# Altium PCB mach-in.PcbDoc
Units mil, origin at the board's own origin, x right, y up, seen from the top; angles counter-clockwise.
Board outline 5675.03 x 3515.03 mil, 2 copper layers (Top Layer, Bottom Layer); 7 components, 19 nets, 90 pads, 0 vias.
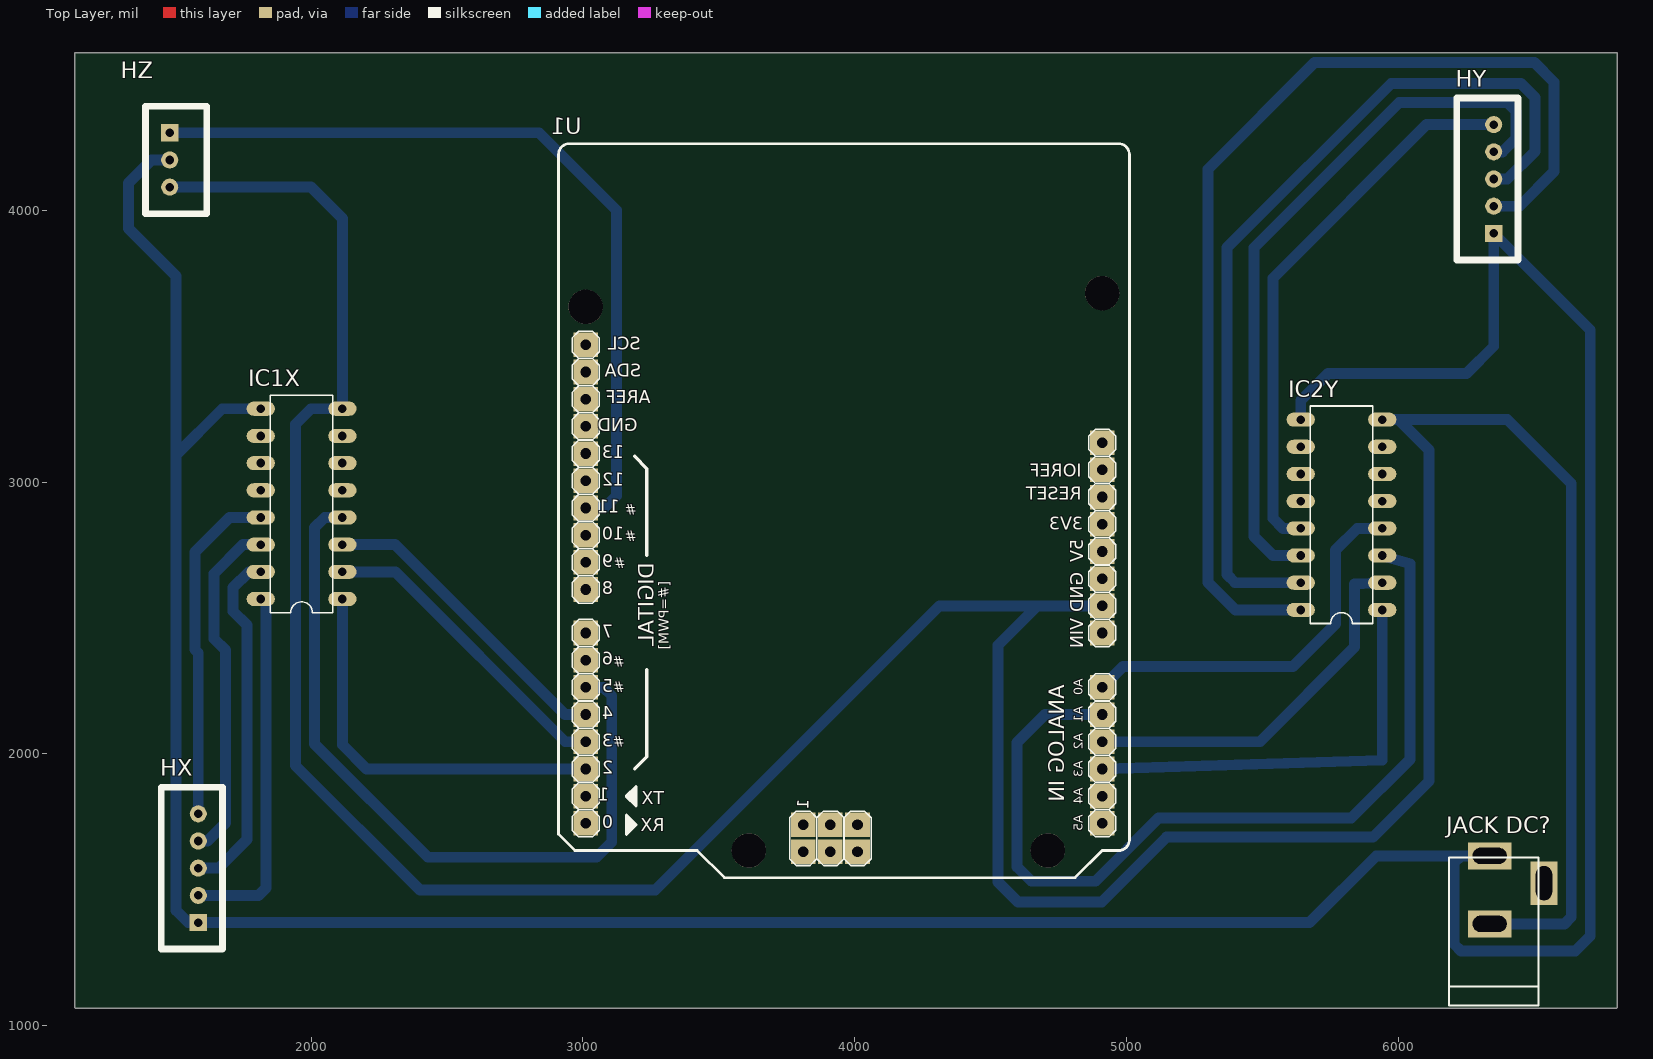
[diagram p0: Top Layer view]
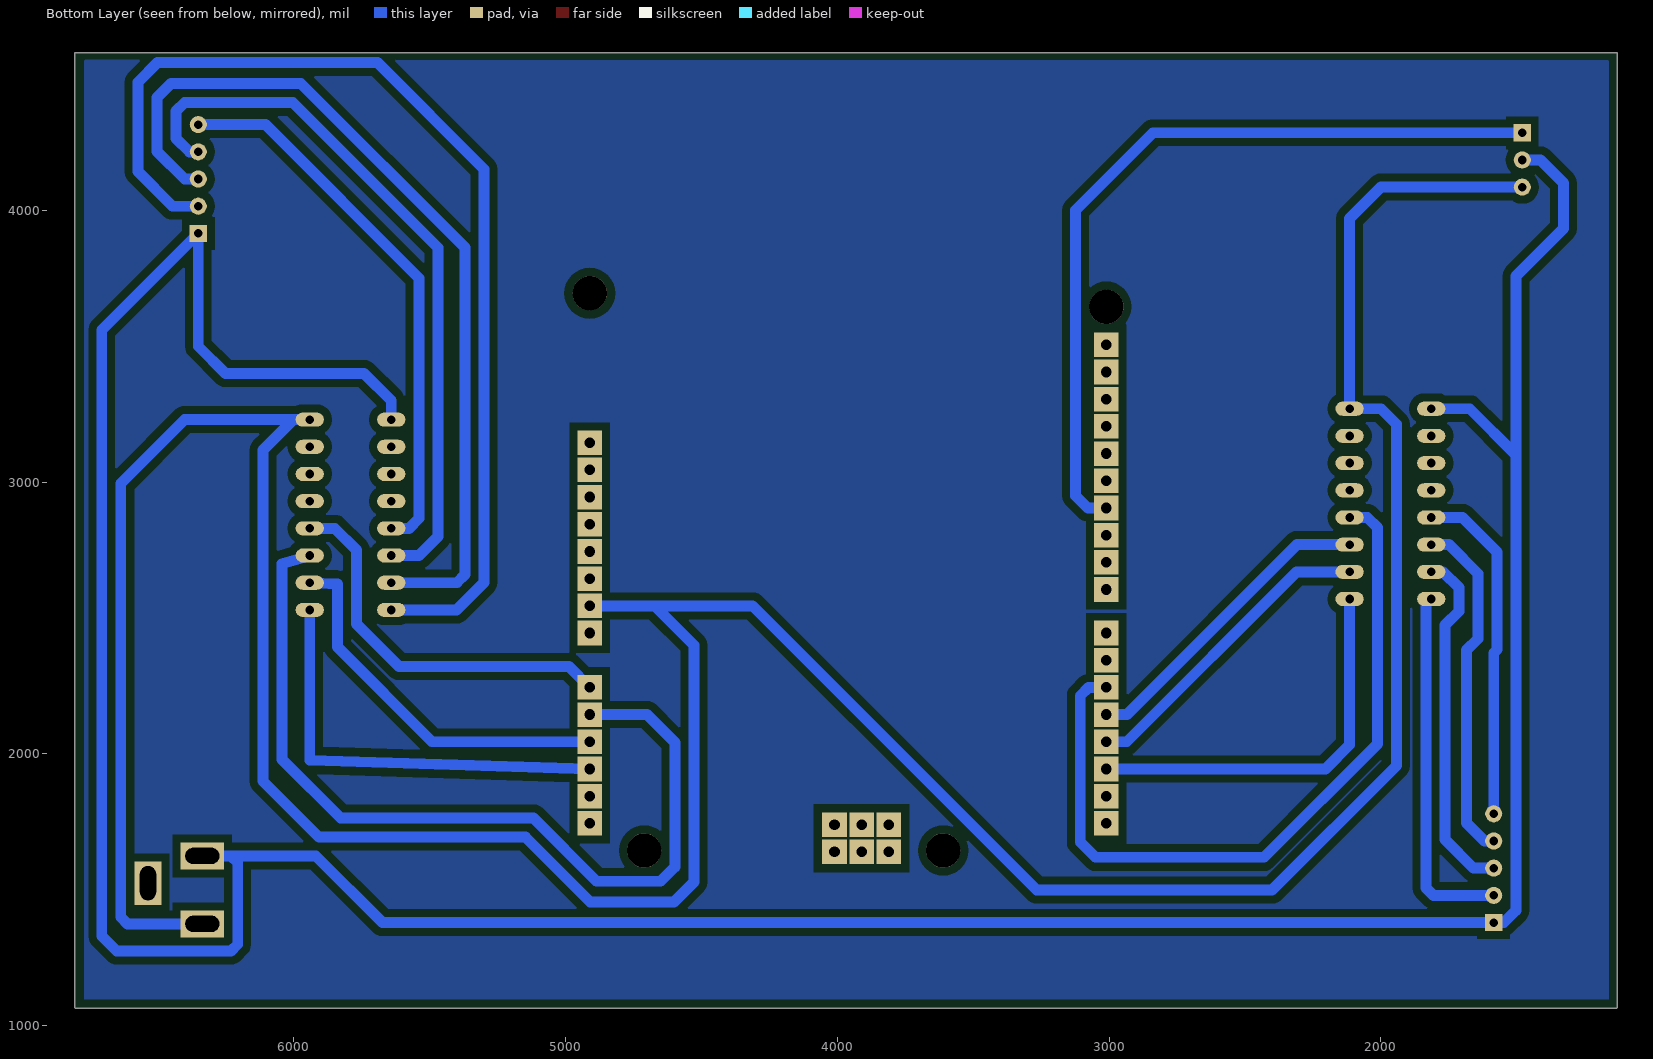
[diagram p1: Bottom Layer view, seen from below]
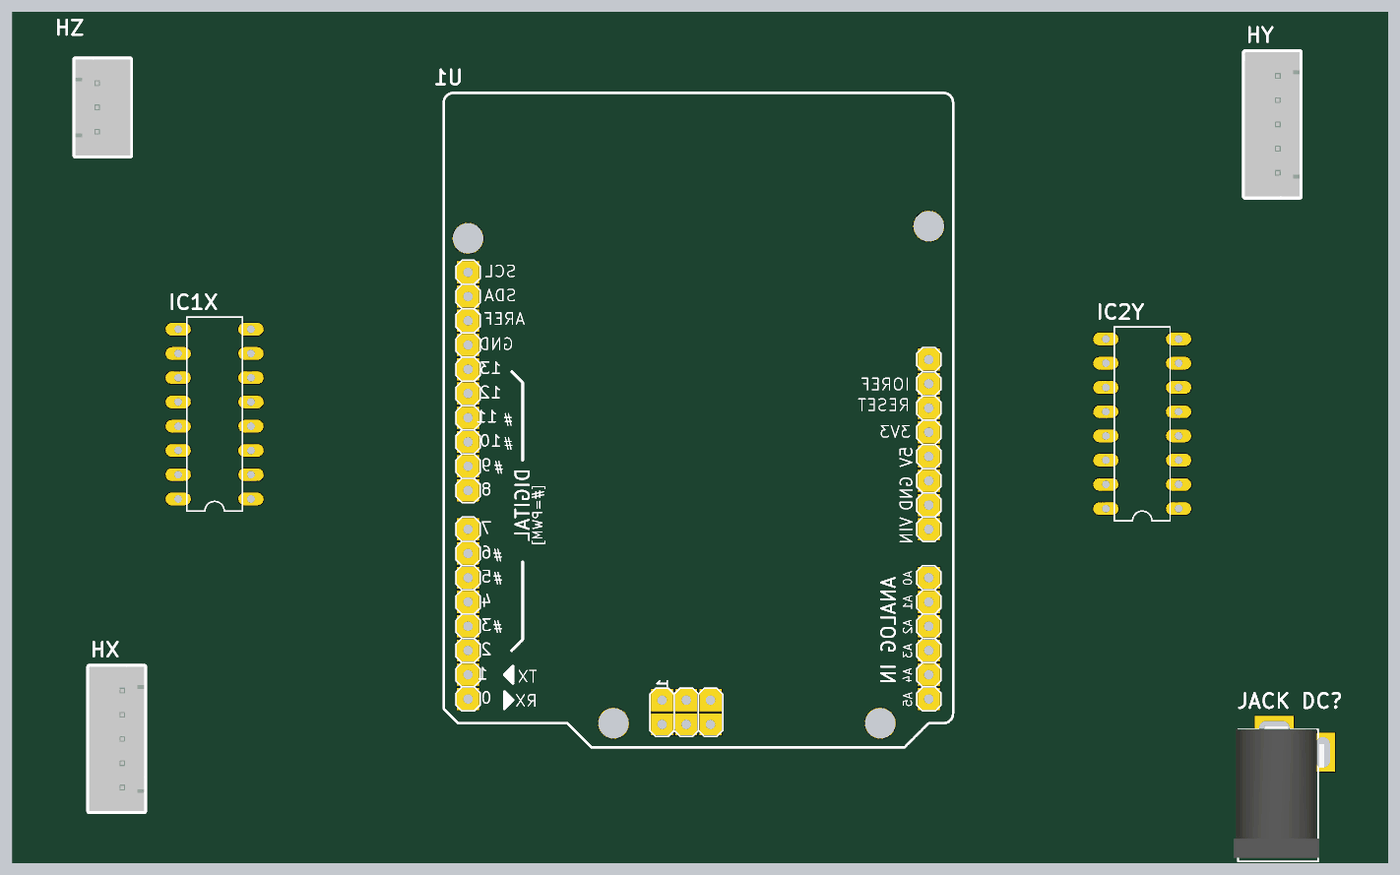
[diagram p2: 3D render of the assembled board from above, using the file's embedded part models]

## Layer stack, top to bottom
Top Solder: solder mask 0.4, Solder Resist, Dk 3.5
Top Layer: signal copper 1.4
Dielectric 1: dielectric 12.6, FR-4, Dk 4.8
Bottom Layer: signal copper 1.4
Bottom Solder: solder mask 0.4, Solder Resist, Dk 3.5

## Board outline
1129.98,1070 1129.98,4575 cw(c1135,4575) 1135,4580.02 6800,4580.02 cw(c6800,4575) 6805.02,4575 6805.02,1070 cw(c6800,1070) 6800,1064.98 1135,1064.98 cw(c1135,1070)

## Design rules (kind name [scope] priority, off if disabled: settings)
Clearance [All] p1: gap=30 ignorepadtopadclearanceinfootprint=FALSE
PolygonConnect [All] p1: connectstyle=Relief reliefconductorwidth=10 reliefentries=4 polygonreliefangle="90 Angle" airgapwidth=10
RoomDefinition mach-nguyen-ly [InComponentClass('mach-nguyen-ly')] p1: confinementstyle=ConfineIn formatcopy=TRUE lockcomponents=FALSE outline 7080,941.97 14415.27,941.97 14415.27,3735 7080,3735
RoutingLayers [All] p1: top layer_v5=FALSE bottom layer_v5=TRUE
RoutingVias [All] p1: holewidth=28 width=50 viastyle="Through Hole" minholewidth=28 minwidth=50 maxholewidth=28 maxwidth=50
SolderMaskExpansion [All] p1: expansion=4
Width [All] p1: maxlimit=70 minlimit=30 preferedwidth=40
29 further rules are at their usual default settings.

## Components (designator, comment, footprint, x,y, rotation, side; value= is the part's Value field where it differs from the comment)
HX "Header 5P 2.54" XH2.54M-5 1585,1380 r90 top
HY "Header 5P 2.54" XH2.54M-5 6350,3915 r90 top
HZ "Header 3P VH3.96" XH2.54M-3 1480,4285 r270 top
IC1X "ULN2003A" DIL16 1965,2920 r90 top
IC2Y "ULN2003A" DIL16 5790,2880 r90 top
"JACK DC?" "JACK DC 5.5" "JACK DC 5.5" 6435,1500 r90 top value="Jac DC"
U1 "Arduino Uno" "Arduino Uno" 3965.12,2825.31 r270 top

## Footprints (in the part's own frame and the unit in brackets; to place one, negate y for a bottom-side part, rotate by r counter-clockwise, add the part's x,y. Pads: shape width x height; smd on the part's side, far side on the other; paste and mask are expansions set on the pad)
"Arduino Uno" [mm]
  rect 2.3x2.3 hole 1: 0(27.44,-24.26) 1(24.9,-24.26) 2(22.36,-24.26) 3(19.82,-24.26) 3V3(-0.5,24) 4(17.28,-24.26) 5(14.74,-24.26) 5V(2.04,24) 6(12.2,-24.26) 7(9.66,-24.26) 8(5.596,-24.26) 9(3.056,-24.26) 10(0.516,-24.26) 11(-2.024,-24.26) 12(-4.564,-24.26) 13(-7.104,-24.26) A0(14.74,24) A1(17.28,24) A2(19.82,24) A3(22.36,24) A4(24.9,24) A5(27.44,24) AREF(-12.184,-24.26) GND1(4.58,24) GND2(7.12,24) GND3(-9.644,-24.26) ICSP1(27.567,-3.94) ICSP2(30.107,-3.94) ICSP3(27.567,-1.4) ICSP4(30.107,-1.4) ICSP5(27.567,1.14) ICSP6(30.107,1.14) IOREF(-5.58,24) NC(-8.12,24) RESET(-3.04,24) SCL(-17.264,-24.26) SDA(-14.724,-24.26) Vin(9.66,24)
  round 3.2 hole 3.2: H1(-20.82,-24.26) H2(-22.09,24) H3(29.98,18.92) H4(29.98,-9.02)
  Bottom Layer lines w0.305: -14.47,-24.26 -14.724,-24.26
  silkscreen extent -36.06,-26.8 32.52,26.54
DIL16 [mil]
  oval 52x104 hole 32: 1(-350,-150) 2(-250,-150) 3(-150,-150) 4(-50,-150) 5(50,-150) 6(150,-150) 7(250,-150) 8(350,-150) 9(350,150) 10(250,150) 11(150,150) 12(50,150) 13(-50,150) 14(-150,150) 15(-250,150) 16(-350,150)
  silkscreen extent -400,-115 400,115
"JACK DC 5.5" [mil] "Jac DC input"
  rect 100x160 hole 59.06 slot 125.98 at 90 deg: 1(125,100) 2(-125,100)
  rect 160x100 hole 59.06 slot 125.98 at 0 deg: 3(25,-100)
  silkscreen extent -425,-80 120,250, body extent -410,-105 134,269, height 434
XH2.54M-3 [mm]
  rect 1.6x1.6 hole 0.8: 1(0,0)
  round 1.6 hole 0.8: 2(2.54,0) 3(5.08,0)
  silkscreen extent -2.48,-2.26 7.56,3.46, body extent -2.48,-2.26 7.56,3.48, height 6.91
XH2.54M-5 [mm]
  rect 1.6x1.6 hole 0.8: 1(0,0)
  round 1.6 hole 0.8: 2(2.54,0) 3(5.08,0) 4(7.62,0) 5(10.16,0)
  silkscreen extent -2.48,-2.26 12.64,3.46, body extent -2.48,-2.26 12.64,3.48, height 6.91

## Part data
HX HY: library part "Header 5P 2.54 Duc Thang", "C?m", Chung_Loai=C?m, Don_Vi=Con, Ma_Hang=MH001298, Ten_Linh_Kien="Header 5P XH2.54-5P Ð?c Th?ng"
HZ: library part "Header 3P 2.54 Duc Thang", "C?m", Chung_Loai=C?m, Don_Vi=Con, Ma_Hang=MH001292, Ten_Linh_Kien="Header 3P XH2.54-3P Ð?c Th?ng"
IC1X IC2Y: "Bipolar _BJT_ Transistor Array 7 NPN Darlington 50V 500mA Through Hole 16-DIP", Package="DIP-16 STMicroelectronics", Availability=Unavailable, MF=STMicroelectronics, MP=ULN2003A, Price=None, SnapEDA_Link=https://www.snapeda.com/parts/ULN2003A/STMicroelectronics/view-part/4503171/?ref=snap

## Nets (pads, with @x,y where several pads share a name; then routed paths per layer and width w, separated by ;. In a path a pad name is that pad's centre, name@x,y a point inside that pad or via, vN(x,y) a via of type N, cw(c..) or ccw(c..) an arc to the next point about the centre after c; other vN are vias at no path point)
5V: "JACK DC?.1" HX.1 HY.1 HZ.2 IC1X.9 IC2Y.9 | length 13147.6
  Bottom Layer w40: HZ.2 1413,4185 1328,4100 1328,3933 1503,3758 1503,3100 ; IC1X.9 1673,3270 1503,3100 ; IC2Y.9 5640,3300 5740,3400 6250,3400 6350,3500 HY.1 6705,3560 6705,1330 6650,1275 6230,1275 6205,1300 6205,1600 6230,1625 ; 6335,1625 6230,1625 ; 1503,3100 1503,1425 1548,1380 HX.1 5673,1380 5918,1625 6230,1625
GND: "JACK DC?.2" HZ.3 IC1X.8 IC2Y.8 U1.GND2 | length 13372.7
  Bottom Layer w40: HZ.3 2000,4085 2115,3970 IC1X.8 2000,3270 1943,3213 1943,1957 2400,1500 3266,1500 4311,2545 4672,2545 ; U1.GND2 4672,2545 ; IC2Y.8 6000,3230 ; 6335,1375 6610,1375 6635,1400 6635,2995 6400,3230 6000,3230 ; 4672,2545 4527,2400 4527,1529 4600,1456 4908,1456 5146,1694 5906,1694 6112,1900 6112,3118 6000,3230
NetHX_2: HX.2 IC1X.16 | length 1342.1
  Bottom Layer w40: HX.2 1806.89,1480 1834,1507.11 1834,2570 IC1X.16
NetHX_3: HX.3 IC1X.15 | length 1296.6
  Bottom Layer w40: HX.3 1658.89,1580 1764,1685.11 1764,2474 1713,2525 1713,2612 1771,2670 IC1X.15
NetHX_4: HX.4 IC1X.14 | length 1277.9
  Bottom Layer w40: HX.4 1618.82,1680 1684.89,1746.06 1684.89,2382.11 1643,2424 1643,2663 1750,2770 IC1X.14
NetHX_5: HX.5 IC1X.13 | length 1262.6
  Bottom Layer w40: HX.5 1585,2372 1573,2384 1573,2743 1700,2870 IC1X.13
NetHY_2: HY.2 IC2Y.16 | length 3971.6
  Bottom Layer w40: IC2Y.16 5400,2530 5299,2631 5299,4151 5691,4543 6500,4543 6572,4471 6572,4142 6445,4015 HY.2
NetHY_3: HY.3 IC2Y.15 | length 3282
  Bottom Layer w40: IC2Y.15 5399,2630 5369,2660 5369,3862.53 5972.97,4466.5 6450,4466.5 6501.5,4415 6501.5,4216.5 6400,4115 HY.3
NetHY_4: HY.4 IC2Y.14 | length 2663.4
  Bottom Layer w40: IC2Y.14 5538,2730 5468,2800 5468,3862 6002.5,4396.5 6400,4396.5 6431.5,4365 6431.5,4264.5 6382,4215 HY.4
NetHY_5: HY.5 IC2Y.13 | length 2046.4
  Bottom Layer w40: IC2Y.13 5575,2830 5538,2867 5538,3750 6103,4315 HY.5
X1: IC1X.1 U1.2 | length 1467.9
  Bottom Layer w40: IC1X.1 2115,2034 2204,1945 U1.2
X2: IC1X.2 U1.3 | length 1153.9
  Bottom Layer w40: IC1X.2 2310,2670 2935,2045 U1.3
X3: IC1X.3 U1.4 | length 1153.9
  Bottom Layer w40: IC1X.3 2309,2770 2934,2145 U1.4
X4: IC1X.4 U1.5 | length 2849.1
  Bottom Layer w40: IC1X.4 2050,2870 2013,2833 2013,2037 2430,1620 3050,1620 3106,1676 3106,2214 3075,2245 U1.5
Y1: IC2Y.1 U1.A3 | length 1583.5
  Bottom Layer w40: U1.A3 5940,1977 IC2Y.1
Y2: IC2Y.2 U1.A2 | length 1406.3
  Bottom Layer w40: U1.A2 5490.03,2045 5838,2392.97 5838,2625 IC2Y.2
Y3: IC2Y.3 U1.A1 | length 3291.5
  Bottom Layer w40: U1.A1 4700,2145 4597,2042 4597,1585 4650,1532 4885,1532 5117,1764 5826.03,1764 6042,1979.97 6042,2700 IC2Y.3
Y4: IC2Y.4 U1.A0 | length 1431.6
  Bottom Layer w40: U1.A0 4987,2322 5612,2322 5768,2478 5768,2750 5848,2830 IC2Y.4
Z0: HZ.1 U1.11 | length 2942.7
  Bottom Layer w40: HZ.1 2838,4285 3123,4000 3123,2950 3078,2905 U1.11
pads on no net: "JACK DC?.3" IC1X.5 IC1X.6 IC1X.7 IC1X.10 IC1X.11 IC1X.12 IC2Y.5 IC2Y.6 IC2Y.7 IC2Y.10 IC2Y.11 IC2Y.12 U1.0 U1.1 U1.3V3 U1.5V U1.6 U1.7 U1.8 U1.9 U1.10 U1.12 U1.13 U1.A4 U1.A5 U1.AREF U1.GND1 U1.GND3 U1.H1 U1.H2 U1.H3 U1.H4 U1.ICSP1 U1.ICSP2 U1.ICSP3 U1.ICSP4 U1.ICSP5 U1.ICSP6 U1.IOREF U1.NC U1.RESET U1.SCL U1.SDA U1.Vin

## Polygon pours and split planes (outlines as drawn)
no net on Bottom Layer "Bottom Layer-No Net" (solid, pour order 4): 1157,4552 1162,4547 1162,1098 6769,1098 6769,4553
no net on Bottom Layer "Bottom Layer-No Net 1" (solid, pour order 2): 1150,4560

## Text inside footprints (layer, text, board x,y; h text height)
U1: Top Overlay "SDA" at 3213.66,3387.18 h47.6; Top Overlay "SCL" at 3213.15,3486.73 h47.6; Top Overlay "#" at 3158.03,2683.58 h37.4; Top Overlay "#" at 3154.09,2321.38 h37.4; Top Overlay "#" at 3154.09,2026.1 h37.4; Top Overlay "#" at 3154.09,2226.89 h37.4; Top Overlay "#" at 3197.4,2782.01 h37.4; Top Overlay "#" at 3197.4,2880.43 h37.4; Top Overlay "[#=PWM]" at 3315,2635 h37.4 r90; Top Overlay "0" at 3111.72,1727.41 h47.6; Top Overlay "1" at 3095.86,1827.41 h47.6; Top Overlay "2" at 3111.72,1927.41 h47.6; Top Overlay "3" at 3111.72,2027.41 h47.6; Top Overlay "4" at 3111.72,2127.41 h47.6; Top Overlay "5" at 3111.72,2227.41 h47.6; Top Overlay "6" at 3111.72,2327.41 h47.6; Top Overlay "7" at 3111.72,2427.41 h47.6; Top Overlay "8" at 3111.72,2587.41 h47.6; Top Overlay "9" at 3111.72,2687.41 h47.6; Top Overlay "10" at 3151.38,2787.41 h47.6; Top Overlay "11" at 3135.52,2887.41 h47.6; Top Overlay "12" at 3151.38,2987.41 h47.6; Top Overlay "13" at 3151.38,3087.41 h47.6; Top Overlay "RX" at 3300,1715 h47.6; Top Overlay "TX" at 3299,1815 h47.6; Top Overlay "DIGITAL" at 3261,2703 h56.1 r90; Top Overlay "IOREF" at 4835,3020 h47.6; Top Overlay "GND" at 4840,2669 h47.6 r90; Top Overlay "VIN" at 4840,2500 h47.6 r90; Top Overlay "A5" at 4839,1776 h34 r90; Top Overlay "A4" at 4839,1876 h34 r90; Top Overlay "A3" at 4839,1976 h34 r90; Top Overlay "A2" at 4839,2076 h34 r90; Top Overlay "A1" at 4839,2176 h34 r90; Top Overlay "3V3" at 4840,2825 h47.6; Top Overlay "RESET" at 4835,2935 h47.6; Top Overlay "GND" at 3201.89,3186.41 h47.6; Top Overlay "1" at 3831,1833 h42.5 r90; Top Overlay "AREF" at 3248.48,3290.41 h47.6; Top Overlay "ANALOG IN" at 4770,2255 h56.1 r90; Top Overlay "A0" at 4839,2276 h34 r90; Top Overlay "5V" at 4840,2790 h47.6 r90